# Altium PCB PokerFace.PcbDoc
Units mm, origin at the board's own origin, x right, y up, seen from the top; angles counter-clockwise.
Board outline 46.23 x 56.39 mm, 2 copper layers (Top Layer, Bottom Layer); 54 components, 99 nets, 312 pads, 39 vias.
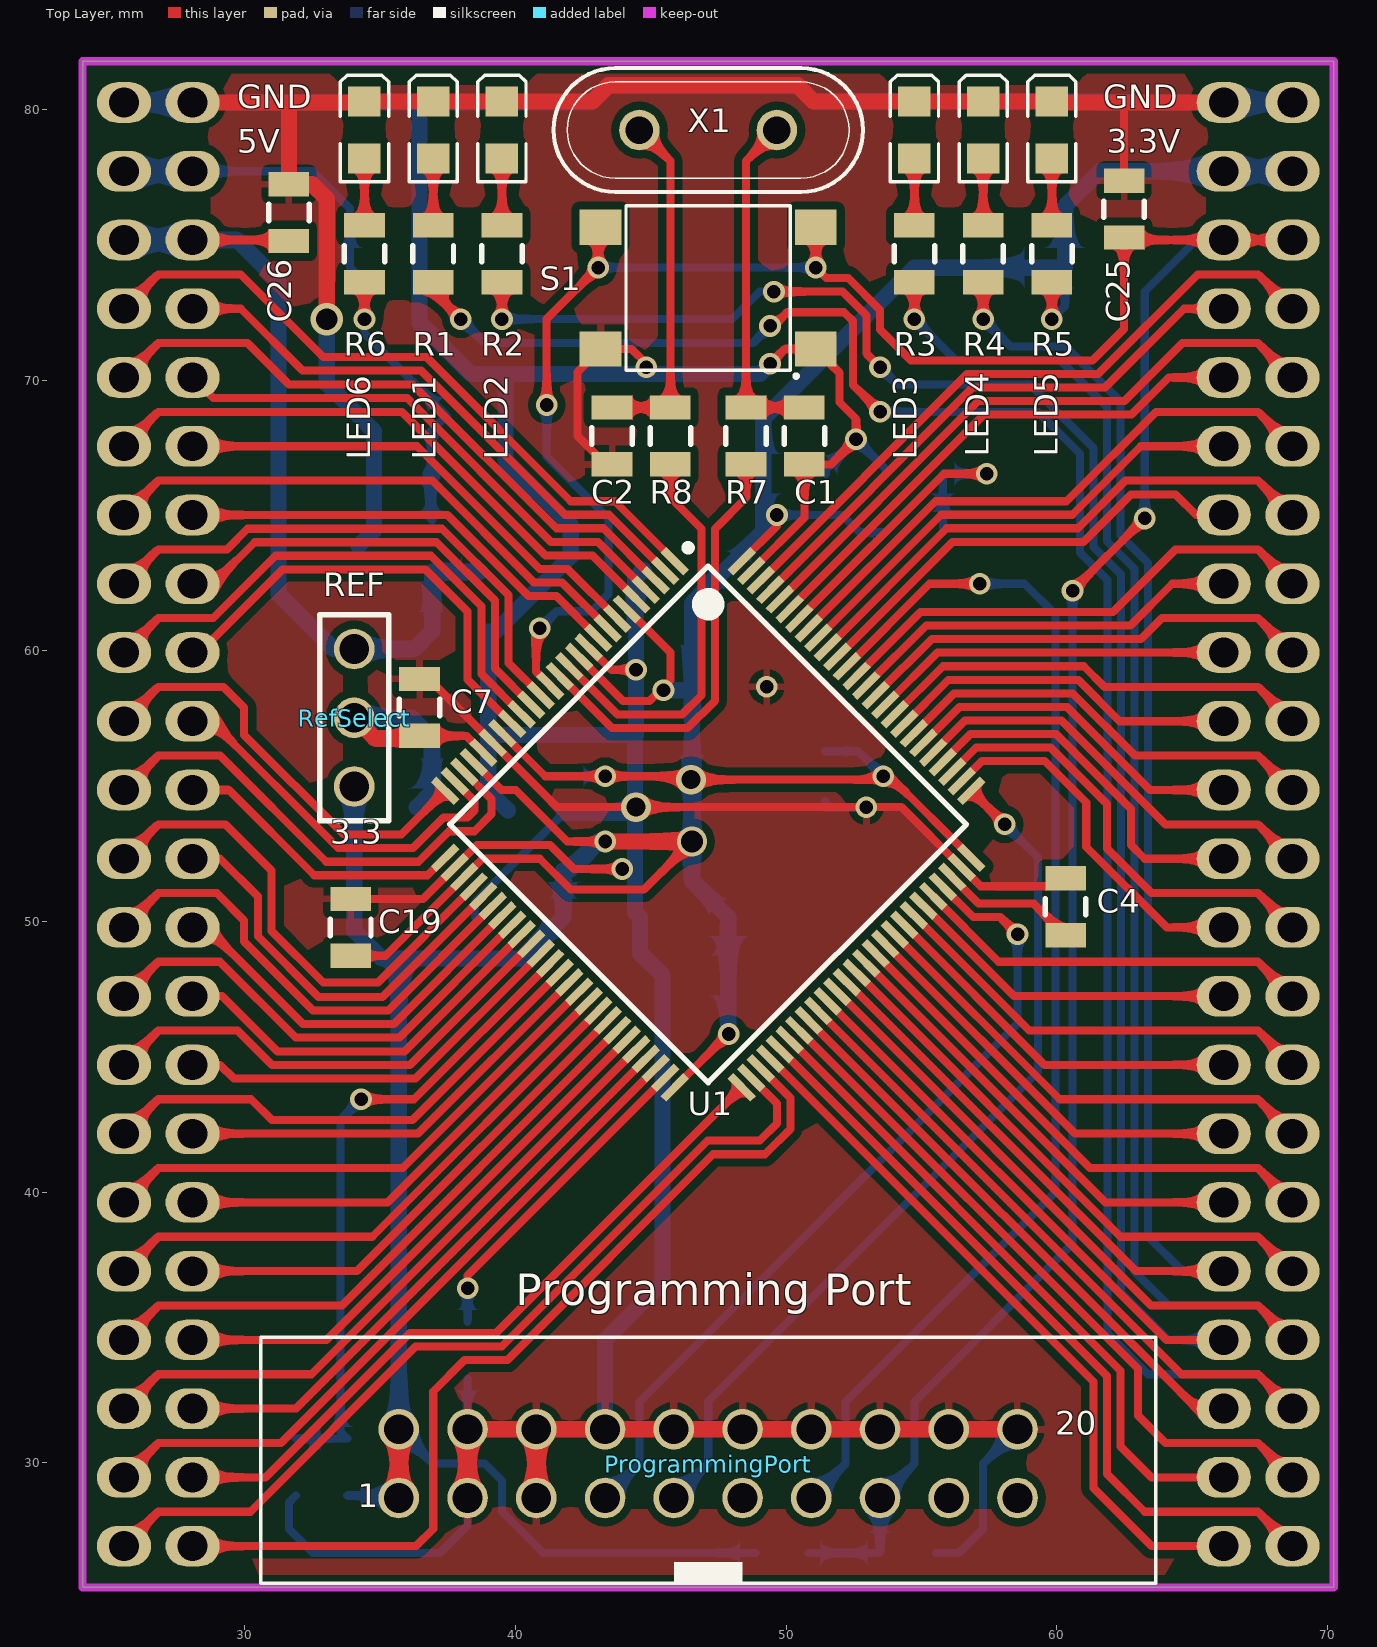
[diagram p0: Top Layer view]
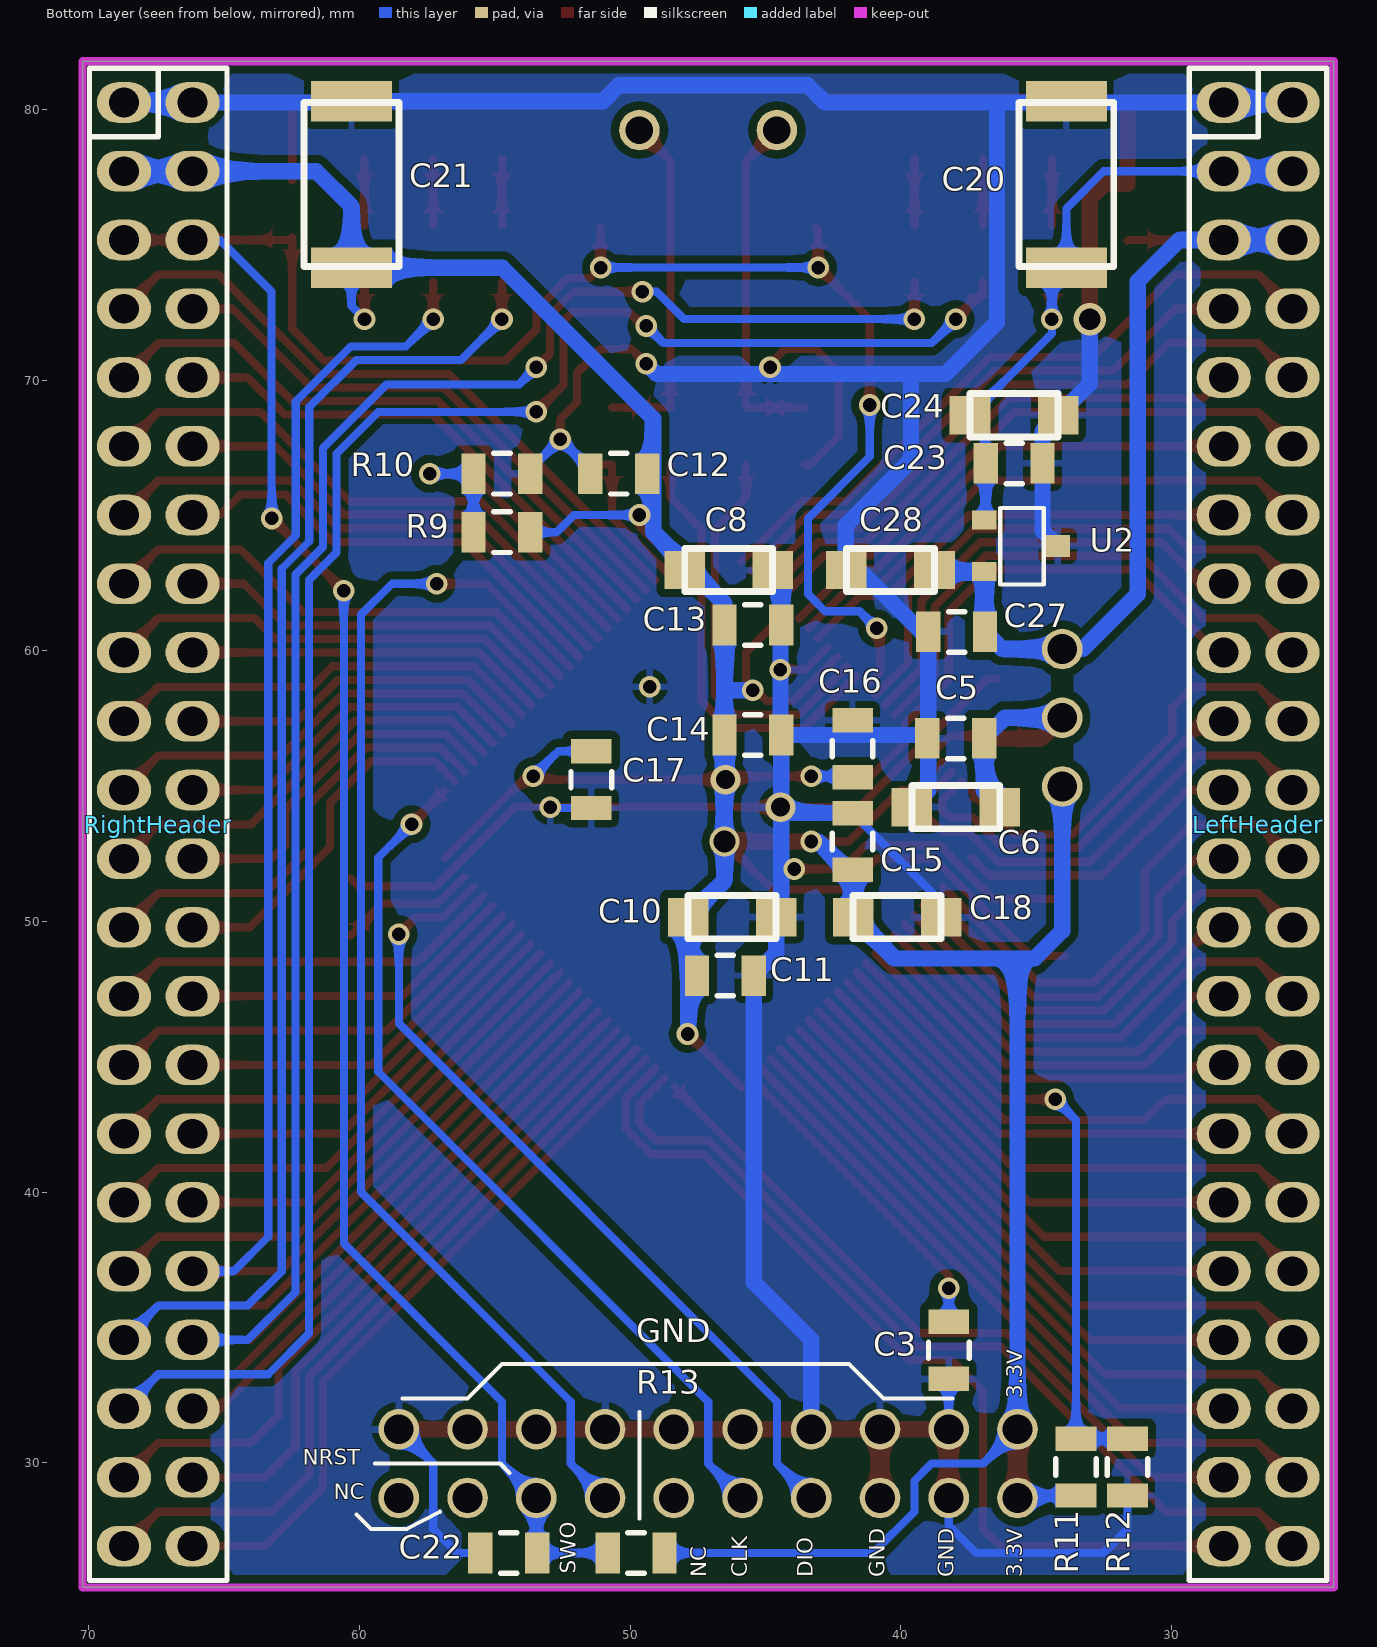
[diagram p1: Bottom Layer view, seen from below]
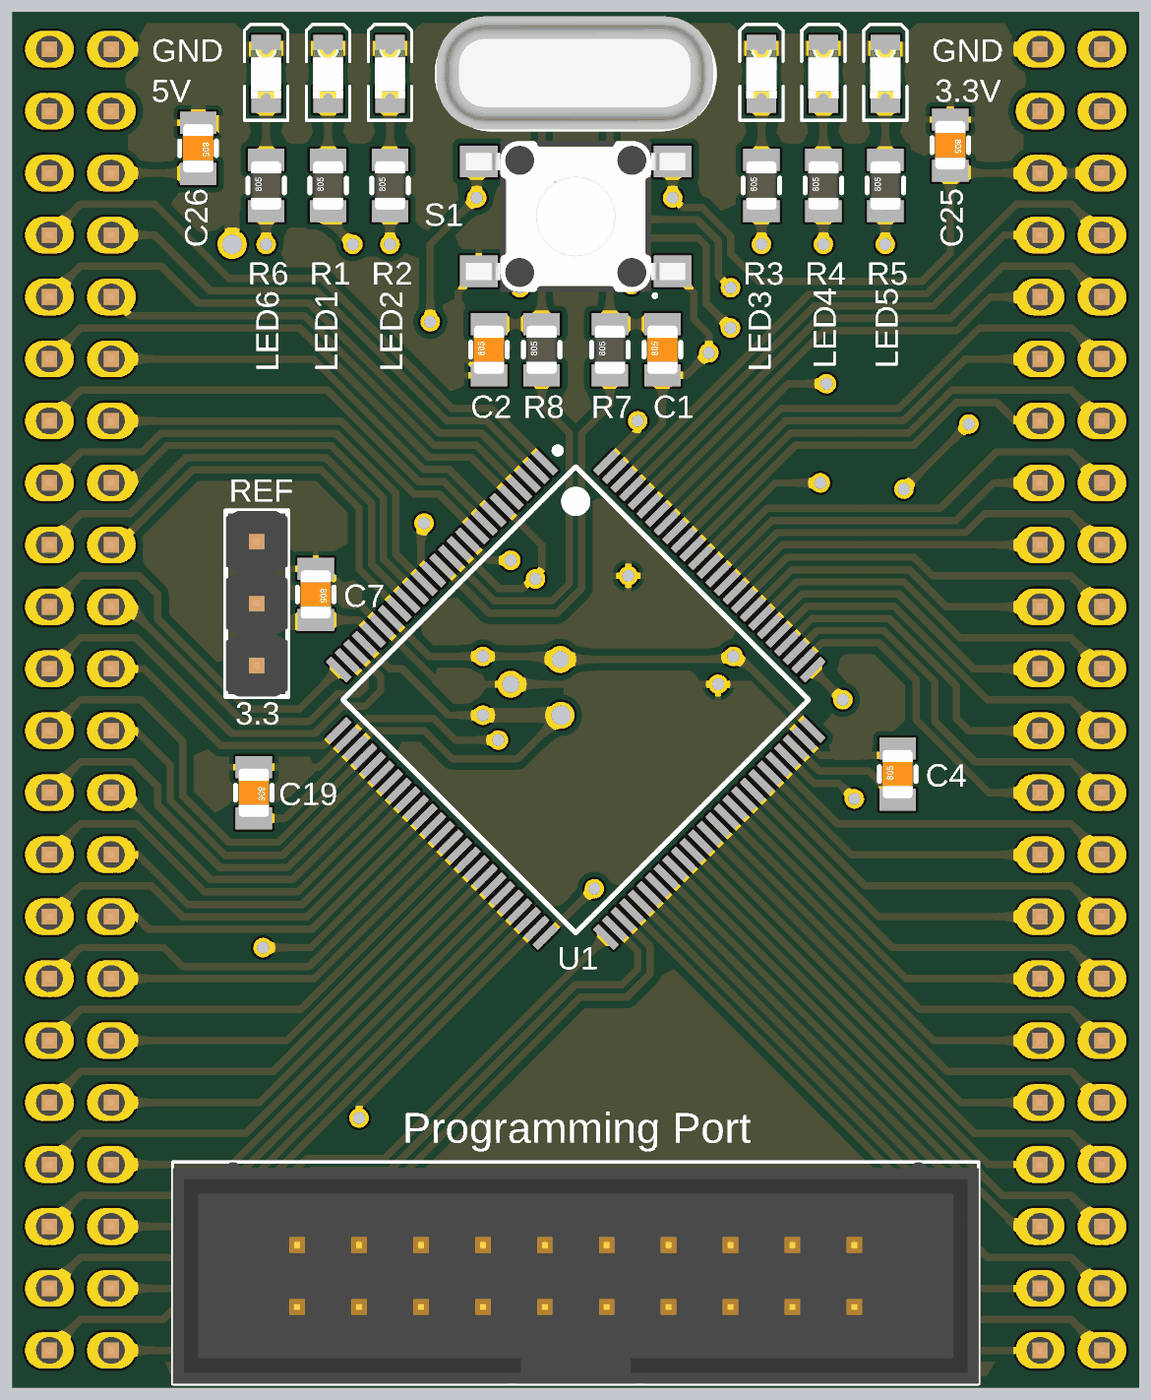
[diagram p2: 3D render of the assembled board from above, using the file's embedded part models]
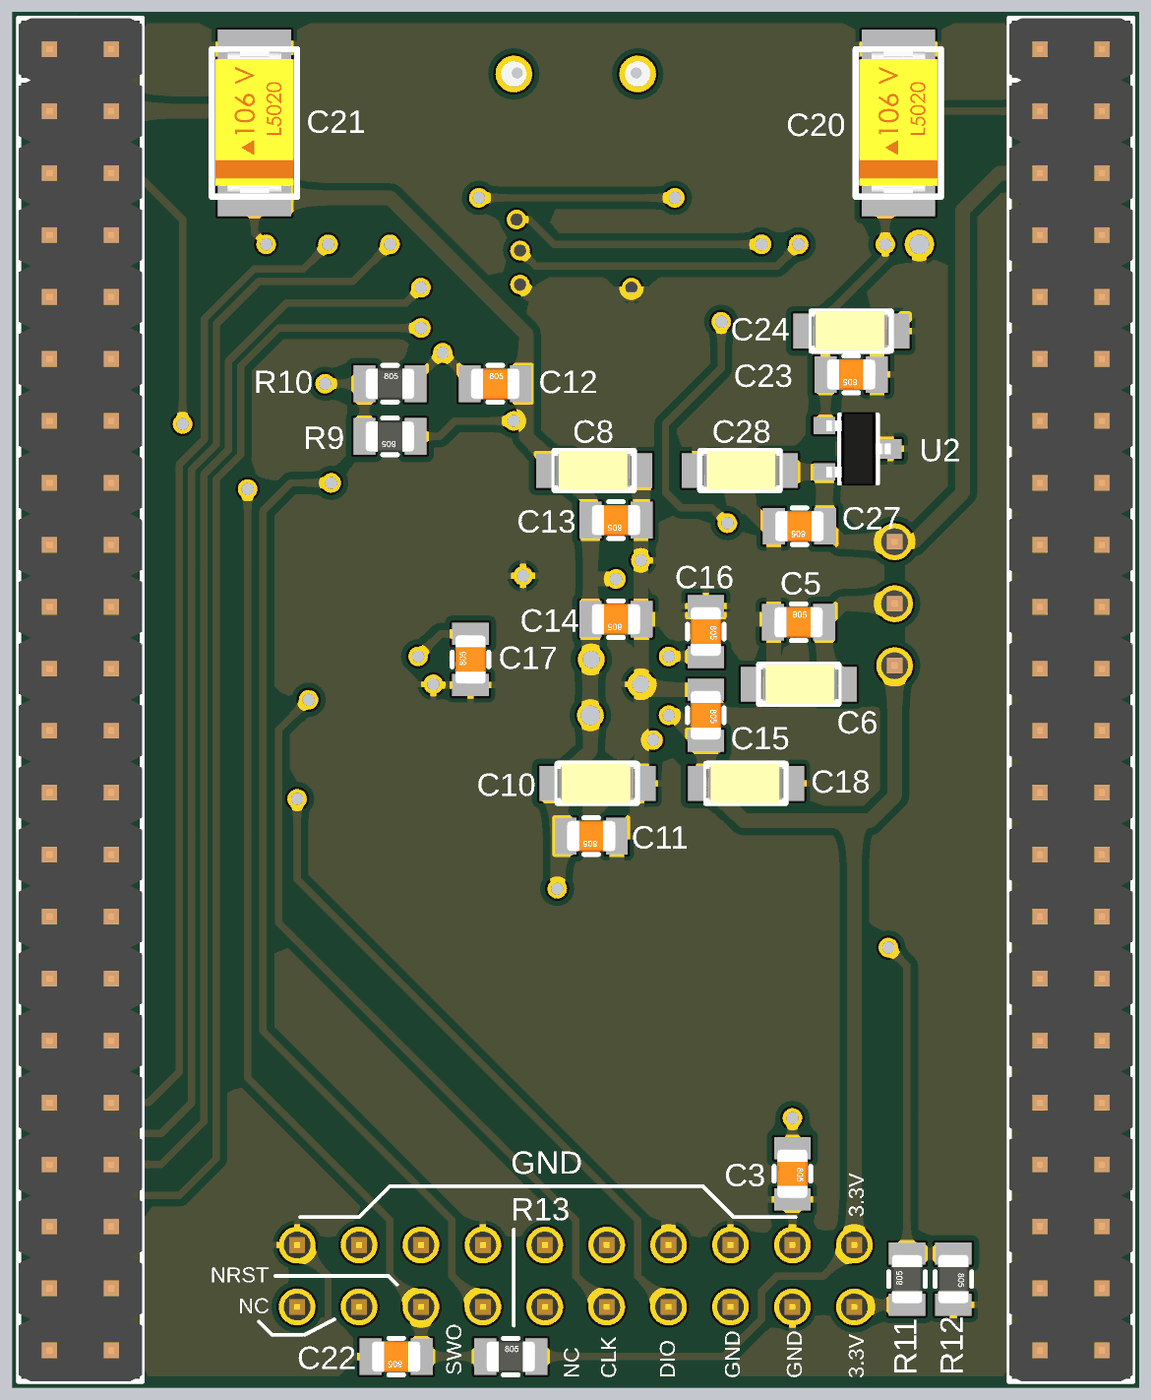
[diagram p3: 3D render of the assembled board from below, using the file's embedded part models]

## Layer stack, top to bottom
Top Solder: solder mask 0.0102, Solder Resist, Dk 3.5
Top Layer: signal copper 0.0356
Dielectric 1: dielectric 0.32, FR-4, Dk 4.8
Bottom Layer: signal copper 0.0356
Bottom Solder: solder mask 0.0102, Solder Resist, Dk 3.5

## Board outline
24.003,25.4 24.003,81.788 70.231,81.788 70.231,25.4

## Design rules (kind name [scope] priority, off if disabled: settings)
Clearance [All] p1: gap=0.2 ignorepadtopadclearanceinfootprint=FALSE except(0.3: Arc-Poly Track-Poly SMDPad-Poly THPad-Poly Via-Poly Fill-Poly Poly-Poly Poly-Region Poly-Text Poly-Hole)
PolygonConnect [All] p1: connectstyle=Relief reliefconductorwidth=0.254 reliefentries=4 polygonreliefangle="90 Angle" airgapwidth=0.254
RoutingVias [All] p1: holewidth=0.5 width=0.8 viastyle="Through Hole" minholewidth=0.5 minwidth=0.8 maxholewidth=1.5 maxwidth=2
SolderMaskExpansion [All] p1: expansion=0.102
Width [All] p1: maxlimit=0.6 minlimit=0.3 preferedwidth=0.3
30 further rules are at their usual default settings.

## Components (designator, comment, footprint, x,y, rotation, side; value= is the part's Value field where it differs from the comment)
C1 "20pF" "SMD 805 CAP" 50.673,67.945 r90 top
C2 "20pF" "SMD 805 CAP" 43.561,67.945 r90 top
C3 "2.2uF" "SMD 805 CAP" 38.227,34.163 r270 bottom
C4 "2.2uF" "SMD 805 CAP" 60.325,50.546 r90 top
C5 "2.2uF" "SMD 805 CAP" 37.973,56.769 r180 bottom
C6 "TantalA-1uF" MY_CAP_SMD-A 37.973,54.229 r0 bottom value=3300u
C7 "100nF" "SMD 805 CAP" 36.449,57.912 r270 top
C8 "1uF" MY_CAP_SMD-A 46.355,62.992 r180 bottom value=3300u
C10 "1uF" MY_CAP_SMD-A 46.228,50.165 r180 bottom value=3300u
C11 "100nF" "SMD 805 CAP" 46.482,48.006 r0 bottom
C12 "100nF" "SMD 805 CAP" 50.419,66.548 r180 bottom
C13 "100nF" "SMD 805 CAP" 45.466,60.96 r0 bottom
C14 "100nF" "SMD 805 CAP" 45.466,56.896 r0 bottom
C15 "100nF" "SMD 805 CAP" 41.783,52.959 r270 bottom
C16 "100nF" "SMD 805 CAP" 41.783,56.388 r270 bottom
C17 "100nF" "SMD 805 CAP" 51.435,55.245 r90 bottom
C18 "TantalA-1uF" MY_CAP_SMD-A 40.132,50.165 r180 bottom value=3300u
C19 "100nF" "SMD 805 CAP" 33.909,49.784 r270 top
C20 "TantalD-220uF" MY_CAP_SMD-D 33.782,76.962 r90 bottom value=3300u
C21 "TantalD-220uF" MY_CAP_SMD-D 60.198,76.962 r90 bottom value=3300u
C22 "100nF" "SMD 805 CAP" 54.483,26.67 r0 bottom
C23 "100nF" "SMD 805 CAP" 35.814,66.929 r0 bottom
C24 "TantalA-1uF" MY_CAP_SMD-A 35.814,68.707 r180 bottom value=3300u
C25 "100nF" "SMD 805 CAP" 62.484,76.327 r270 top
C26 "100nF" "SMD 805 CAP" 31.623,76.2 r270 top
C27 "100nF" "SMD 805 CAP" 37.939,60.706 r0 bottom
C28 "TantalA-1uF" MY_CAP_SMD-A 40.386,62.992 r0 bottom value=3300u
LED1 "150080BS75000" LED_0805_Blue 36.957,79.248 r90 top
LED2 "150080BS75000" LED_0805_Blue 39.497,79.248 r90 top
LED3 "150080BS75000" LED_0805_Blue 54.737,79.248 r90 top
LED4 "150080BS75000" LED_0805_Blue 57.277,79.248 r90 top
LED5 "150080BS75000" LED_0805_Blue 59.817,79.248 r90 top
LED6 "150080BS75000" LED_0805_Blue 34.417,79.248 r90 top
LeftHeader "WE-2.54 mm Pin Header & Jumper 61304421121" 61304421121 26.797,53.594 r270 bottom
ProgrammingPort "Compatible With STLINKV2" 61202021621 47.117,29.972 r0 top
R1 "470" "SMD 805" 36.957,74.676 r90 top
R2 "470" "SMD 805" 39.497,74.676 r90 top
R3 "470" "SMD 805" 54.737,74.676 r90 top
R4 "470" "SMD 805" 57.277,74.676 r90 top
R5 "470" "SMD 805" 59.817,74.676 r90 top
R6 "470" "SMD 805" 34.417,74.676 r90 top
R7 "220" "SMD 805" 48.514,67.945 r90 top
R8 "0" "SMD 805" 45.72,67.945 r90 top
R9 "10K" "SMD 805" 54.737,64.389 r0 bottom
R10 "510" "SMD 805" 54.737,66.548 r180 bottom
R11 "10K" "SMD 805" 33.528,29.845 r90 bottom
R12 "510" "SMD 805" 31.623,29.845 r270 bottom
R13 "10K" "SMD 805" 49.784,26.67 r180 bottom
RefSelect "WE-2.54 mm Pin Header & Jumper 61300311121" 61300311121 34.036,54.991 r90 top
RightHeader "WE-2.54 mm Pin Header & Jumper 61304421121" 61304421121 67.437,53.594 r270 bottom
S1 "6*6 TactSwitch" 4301x20508x6 47.117,73.406 r180 top
U1 "STM32F407VGT6" LQFP100_V 47.117,53.594 r315 top locked
U2 "ISL21010" SOT-23 35.56,63.881 r270 bottom
X1 "8MHz-10ppm" My_Crystal 47.117,79.248 r0 top

## Footprints (in the part's own frame and the unit in brackets; to place one, negate y for a bottom-side part, rotate by r counter-clockwise, add the part's x,y. Pads: shape width x height; smd on the part's side, far side on the other; paste and mask are expansions set on the pad)
4301x20508x6 [mm] "6*6mm vertical type, SMD, height 5.0mm, black actuator, 160gf, T&R"
  rect 1.55x1.3 smd: 1(-3.975,2.25) 2(-3.975,-2.25) 3(3.975,2.25) 4(3.975,-2.25)
  silkscreen extent -3.29,-3.04 3.04,3.29, body extent -4.5,-3.1 4.5,3.1, height 4.99
61202021621 [mm] "20 pins, straight, gold plating"
  round 1.5 hole 1.1: 1(-11.43,-1.27) 2(-11.43,1.27) 3(-8.89,-1.27) 4(-8.89,1.27) 5(-6.35,-1.27) 6(-6.35,1.27) 7(-3.81,-1.27) 8(-3.81,1.27) 9(-1.27,-1.27) 10(-1.27,1.27) 11(1.27,-1.27) 12(1.27,1.27) 13(3.81,-1.27) 14(3.81,1.27) 15(6.35,-1.27) 16(6.35,1.27) 17(8.89,-1.27) 18(8.89,1.27) 19(11.43,-1.27) 20(11.43,1.27)
  silkscreen extent -16.53,-4.42 16.53,4.68, body extent -16.53,-4.42 16.53,4.68, height 9.13
61300311121 [mm] "3 pins, 1 row, straight, gold plating"
  round 1.5 hole 1.1: 1(0,0) 2(2.54,0) 3(5.08,0)
  silkscreen extent -1.27,-1.27 6.35,1.27, body extent -1.27,-1.27 6.35,1.27, height 8.54
61304421121 [mm] "44 pins, dual pin, straight, gold plating"
  oval 1.5x2 hole 1.1: 1(-26.67,-1.27) 2(-24.13,-1.27) 3(-21.59,-1.27) 4(-19.05,-1.27) 5(-16.51,-1.27) 6(-13.97,-1.27) 7(-11.43,-1.27) 8(-8.89,-1.27) 9(-6.35,-1.27) 10(-3.81,-1.27) 11(-1.27,-1.27) 12(1.27,-1.27) 13(3.81,-1.27) 14(6.35,-1.27) 15(8.89,-1.27) 16(11.43,-1.27) 17(13.97,-1.27) 18(16.51,-1.27) 19(19.05,-1.27) 20(21.59,-1.27) 21(24.13,-1.27) 22(26.67,-1.27) 23(26.67,1.27) 24(24.13,1.27) 25(21.59,1.27) 26(19.05,1.27) 27(16.51,1.27) 28(13.97,1.27) 29(11.43,1.27) 30(8.89,1.27) 31(6.35,1.27) 32(3.81,1.27) 33(1.27,1.27) 34(-1.27,1.27) 35(-3.81,1.27) 36(-6.35,1.27) 37(-8.89,1.27) 38(-11.43,1.27) 39(-13.97,1.27) 40(-16.51,1.27) 41(-19.05,1.27) 42(-21.59,1.27) 43(-24.13,1.27) 44(-26.67,1.27)
  silkscreen extent -27.94,-2.54 27.94,2.54, body extent -27.94,-2.54 27.94,2.54, height 8.55
LED_0805_Blue [mm] "Chip LED, 2-Leads, Body 2.0x1.3mm, IPC Medium Density"
  rect 1.1x1.2 smd: 1(-1.05,0) 2(1.05,0)
  silkscreen extent -1.91,-0.89 2.03,0.89, body extent -1,-0.63 1,0.62, height 0.68
LQFP100_V [mm] "Thin QFP, 100-Leads, Body 14x14mm, Pitch 0.5mm, ST Recommended"
  rect 1.2x0.3 smd: 1(-7.75,6) 2(-7.75,5.5) 3(-7.75,5) 4(-7.75,4.5) 5(-7.75,4) 6(-7.75,3.5) 7(-7.75,3) 8(-7.75,2.5) 9(-7.75,2) 10(-7.75,1.5) 11(-7.75,1) 12(-7.75,0.5) 13(-7.75,0) 14(-7.75,-0.5) 15(-7.75,-1) 16(-7.75,-1.5) 17(-7.75,-2) 18(-7.75,-2.5) 19(-7.75,-3) 20(-7.75,-3.5) 21(-7.75,-4) 22(-7.75,-4.5) 23(-7.75,-5) 24(-7.75,-5.5) 25(-7.75,-6) 51(7.75,-6) 52(7.75,-5.5) 53(7.75,-5) 54(7.75,-4.5) 55(7.75,-4) 56(7.75,-3.5) 57(7.75,-3) 58(7.75,-2.5) 59(7.75,-2) 60(7.75,-1.5) 61(7.75,-1) 62(7.75,-0.5) 63(7.75,0) 64(7.75,0.5) 65(7.75,1) 66(7.75,1.5) 67(7.75,2) 68(7.75,2.5) 69(7.75,3) 70(7.75,3.5) 71(7.75,4) 72(7.75,4.5) 73(7.75,5) 74(7.75,5.5) 75(7.75,6)
  rect 0.3x1.2 smd: 26(-6,-7.75) 27(-5.5,-7.75) 28(-5,-7.75) 29(-4.5,-7.75) 30(-4,-7.75) 31(-3.5,-7.75) 32(-3,-7.75) 33(-2.5,-7.75) 34(-2,-7.75) 35(-1.5,-7.75) 36(-1,-7.75) 37(-0.5,-7.75) 38(0,-7.75) 39(0.5,-7.75) 40(1,-7.75) 41(1.5,-7.75) 42(2,-7.75) 43(2.5,-7.75) 44(3,-7.75) 45(3.5,-7.75) 46(4,-7.75) 47(4.5,-7.75) 48(5,-7.75) 49(5.5,-7.75) 50(6,-7.75) 76(6,7.75) 77(5.5,7.75) 78(5,7.75) 79(4.5,7.75) 80(4,7.75) 81(3.5,7.75) 82(3,7.75) 83(2.5,7.75) 84(2,7.75) 85(1.5,7.75) 86(1,7.75) 87(0.5,7.75) 88(0,7.75) 89(-0.5,7.75) 90(-1,7.75) 91(-1.5,7.75) 92(-2,7.75) 93(-2.5,7.75) 94(-3,7.75) 95(-3.5,7.75) 96(-4,7.75) 97(-4.5,7.75) 98(-5,7.75) 99(-5.5,7.75) 100(-6,7.75)
  silkscreen extent -7.87,-6.75 6.75,6.82, body extent -7,-7 7,7, height 1.6
MY_CAP_SMD-A [mm] "1.6X3.25"
  rect 1.5x1.42 smd: +(-1.63,0) -(1.63,0)
  silkscreen extent -1.63,-0.8 1.62,0.8, body extent -1.64,-0.8 1.54,0.8, height 1.77
MY_CAP_SMD-D [mm] "3.5X6"
  rect 1.5x3 smd: +(-2.8,0.1) -(3.35,0.1)
  silkscreen extent -2.75,-1.65 3.3,1.85, body extent -2.6,-1.5 3.2,1.7, height 2.6
My_Crystal [mm]
  round 1.5 hole 1.016: 1(-2.54,0) 2(2.54,0)
  silkscreen extent -5.71,-2.29 5.71,2.29, body extent -5.71,-2.29 5.64,2.36, height 3.8
"SMD 805" [mm]
  rect 0.9x1.5 smd: 1(1.05,0) 2(-1.05,0)
  silkscreen extent -0.3,-0.75 0.3,0.75, body extent -1,-0.62 1,0.63, height 0.78
"SMD 805 CAP" [mm]
  rect 0.9x1.5 smd: 1(1.05,0) 2(-1.05,0)
  silkscreen extent -0.3,-0.75 0.3,0.75, body extent -1,-0.62 1,0.63, height 0.78
SOT-23 [mm]
  rect 0.7x0.9 smd: 1(-0.95,-1.36) 3(0.95,-1.36)
  rect 0.8x0.9 smd: 2(0,1.36)
  silkscreen extent -1.4,-0.76 1.42,0.84, body extent -1.5,-1.28 1.5,1.36, height 1.08

## Part data
C1 C2 C3 C4 C5 C7 C11 C12 C13 C14 C15 C16 C17 C19 C22 C23 C25 C26 C27: library part "CAP without Pole"
C6 C8 C10 C18 C24 C28: library part CAP_TANTAL_A, "3.2X1.6MM"
C20 C21: library part CAP_TANTAL_D, "7.3X4.3MM"
LED1 LED2 LED3 LED4 LED5 LED6: library part "WL-SMCW 0805  150080BS75000", "SMD mono-color Chip LED, WL-SMCW, Blue", Color=Blue, Manufacturer="W?th Elektronik eiSos GmbH", ComponentLink1Description=Manufacturer, ComponentLink1URL=http://www.we-online.de, ComponentLink2Description=Datasheet, ComponentLink2URL=http://katalog.we-online.com/led/datasheet/150080BS75000.pdf, Created by="Christin Otto", Created Date="June 2013", partNo=150080BS75000
LeftHeader RightHeader: "WR-PHD 2.54 mm Dual Pin Header", Manufacturer="Würth Elektronik eiSos GmbH", partNo=61304421121, ComponentLink1 Description=Manufacturer, ComponentLink1URL=http://www.we-online.com, ComponentLink2 Description=Datasheet, ComponentLink2URL=http://katalog.we-online.de/em/datasheet/6130xx21121.pdf, Created by="Karrer Zheng", Created Date="25 March 2013", NoPins=44
ProgrammingPort: library part "WE-2,54mm_Box Header 61202021621", "WR-BHD 2.54mm Male Box Header", Manufacturer="Würth Elektronik eiSos GmbH", partNo=61202021621, ComponentLink1 Description=Manufacturer, ComponentLink1URL=http://www.we-online.com, ComponentLink2 Description=Datasheet, ComponentLink2URL=http://katalog.we-online.de/em/datasheet/6120xx21621.pdf, Created by="Karrer Zheng", Created Date="6 May 2013", NoPins=20
R1 R2 R3 R4 R5 R6 R7 R8 R9 R10 R11 R12 R13: library part Resistor
RefSelect: "WR-PHD 2.54mm Pin Header", Manufacturer="Würth Elektronik eiSos GmbH", partNo=61300311121, ComponentLink1 Description=Manufacturer, ComponentLink1URL=http://www.we-online.com, ComponentLink2 Description=Datasheet, ComponentLink2URL=http://katalog.we-online.de/em/datasheet/6130xx11121.pdf, Created by="Karrer Zheng", Created Date="22 March 2013", NoPins=03
S1: library part "WS-TASV, 430152050836", "WS-TASV 6x6 mm SMD", Manufacturer="Wurth Elektronik", partNo=430152050836, ComponentLink1Description=Manufacturer, ComponentLink1URL=http://www.we-online.de, ComponentLink2Description=Datasheet, ComponentLink2URL=http://katalog.we-online.de/em/datasheet/4301x2xxx8x6.pdf, Created by="Baojun Chen", Created Date=Dec.2015
U1: "ARM Cortex-M4 32b MCU+FPU, 210DMIP, 1024 kB Flash, 192+4 kB RAM, Camera, 82 I/Os, 100-pin LQFP, -40 to +85癈, Tray", Operating Frequency (Processor Speed)=168MHz, 16-bit Timers (IC/OC/PWM)=12x16-bit(24/24/30), 32-bit Timer (IC/OC/PWM)="2x32-bit (8/8/8)", A/D Converter=16x12-bit, ComponentLink1Description="Manufacturer URL", ComponentLink1URL=http://www.st.com/, ComponentLink2Description="STM32F405/7 Datasheet", ComponentLink2URL=http://www.st.com/internet/com/TECHNICAL_RESOURCES/TECHNICAL_LITERATURE/DATASHEET/DM00037051.pdf, ComponentLink3Description="STM32F4 Web Page", ComponentLink3URL=http://www.st.com/internet/mcu/subclass/1521.jsp, D/A Converter=2x12-bit, DatasheetVersion="rev2, Jan-2012", Internal RAM=192kB, Other Timer Functions="2xWDG, RTC, 24-bit down counter", PackageDescription="100-Pin Low Profile Quad Flat Package, 14x14 mm Body, 0.5 mm Pitch", PackageReference=LQFP100, PackageVersion=2012, Serial Interface="3xSPI/2xI2S/2xI2C/3xUSART(IrDa, ISO7816)/3xUART/2xUSB OTG FS/HS, 2xCAN/Ethernet MAC10/100, SDIO"
X1: library part CRYSTAL, "Crystal"

## Via types
v1: diameter 0.8, hole 0.5, Top Layer to Bottom Layer, 35 vias
v2: diameter 1.1, hole 0.7, Top Layer to Bottom Layer, 2 vias
v3: diameter 1.2, hole 0.8, Top Layer to Bottom Layer, 1 vias
v4: diameter 1.1, hole 0.8, Top Layer to Bottom Layer, 1 vias

## Nets (pads, with @x,y where several pads share a name; then routed paths per layer and width w, separated by ;. In a path a pad name is that pad's centre, name@x,y a point inside that pad or via, vN(x,y) a via of type N, cw(c..) or ccw(c..) an arc to the next point about the centre after c; other vN are vias at no path point)
3.3V: C8.+ C10.+ C11.1 C12.1 C13.1 C14.1 C15.1 C16.1 C17.1 C18.+ C19.1 C21.+ ProgrammingPort.1 ProgrammingPort.2 R5.2 R9.2 R11.2 R13.1 RefSelect.1 RightHeader.2 RightHeader.43 U1.6 U1.11 U1.19 U1.22 U1.28 U1.50 U1.75 U1.100 | length 174.3
  Top Layer w0.3: C19.1 35.186,48.734 U1.28 38.776,52.324 40.894,52.324 42.037,51.181 44.738,51.181 v4(46.516,52.959) ; U1.22 39.483,54.864 40.005,54.864 41.91,52.959 v1(43.307,52.959) ; U1.19 41.096,55.372 v1(43.307,55.372) 46.355,55.372 v2(46.482,55.245) 53.455,55.245 v1(53.582,55.372) 53.824,55.372 U1.75 ; U1.11 43.975,58.15 44.942,58.15 45.339,58.547 v1(45.466,58.547) 45.466,58.674 45.72,58.928 45.72,59.941 U1.6 ; U1.50 v1@47.867,45.859 ; U1.100 49.657,64.619 v1(49.657,65.024) ; v1(59.817,72.263) R5.2 R5.2@59.817,73.753
  Top Layer w0.6: ProgrammingPort.1 ProgrammingPort.2 ; v1(43.307,52.959) v4(46.516,52.959)
  Bottom Layer w0.3: R11.2@33.782,28.795 35.594,28.795 ProgrammingPort.1 ; ProgrammingPort.2 36.957,29.972 38.862,29.972 39.497,29.337 39.497,28.194 41.021,26.67 R13.1 R13.1@48.861,26.67 ; C16.1@41.656,55.338 41.69,55.372 v1(43.307,55.372) ; C15.1@41.762,51.888 C15.1 C15.1@42.003,51.909 ; v1@43.053,52.959 v1(43.307,52.959) ; 46.508,58.539 46.516,58.547 ; v1(49.657,65.024) 52.07,65.024 52.705,64.389 R9.2 ; C17.1 52.659,56.295 v1(53.582,55.372) ; v1(59.817,72.263) 60.298,72.744 C21.+
  Bottom Layer w0.6: RefSelect.1 34.036,49.657 35.052,48.641 35.687,48.641 ; ProgrammingPort.2 35.687,48.641 ; C15.1@41.762,51.888 C18.+ 40.238,48.641 35.687,48.641 ; C15.1@42.003,51.909 v1@43.053,52.959 ; v1(45.466,58.547) 46.5,58.547 46.508,58.539 ; v1(47.879,45.847) 47.858,45.868 C10.+ 46.516,51.507 v4(46.516,52.959) C14.1 46.516,58.547 C13.1 46.516,61.756 49.149,64.389 49.149,68.58 54.731,74.162 C21.+ 60.298,76.427 61.595,77.724 RightHeader.43 RightHeader.2
3.3VRef: C26.1 C27.2 C28.+ LeftHeader.3 LeftHeader.42 RefSelect.3 U2.3 | length 32.3
  Top Layer w0.3: LeftHeader.3 31.589,75.184 C26.1
  Bottom Layer w0.3: C27.2 C27.2@36.92,60.737 ; C28.+@38.695,62.931 C28.+
  Bottom Layer w0.6: LeftHeader.42 LeftHeader.3 29.718,75.184 31.242,73.66 31.242,62.103 33.274,60.071 RefSelect.3 36.254,60.071 C27.2 ; C27.2@36.92,60.737 U2.3 C28.+@38.695,62.931
5V: C20.+ C23.1 C24.+ LeftHeader.2 LeftHeader.43 R6.2 U2.1 | length 23.6
  Top Layer w0.3: v1(34.417,72.263) R6.2
  Bottom Layer w0.3: LeftHeader.2 32.512,77.724 33.882,76.354 C20.+ 34.417,73.627 v1(34.417,72.263) 34.417,71.734 C24.+ 36.864,68.127 C23.1 36.864,66.538 36.864,64.887 U2.1
  Bottom Layer w0.6: LeftHeader.43 LeftHeader.2 ; C23.1@36.864,66.538 C23.1@36.92,66.482
GND: C1.2 C2.2 C3.1 C4.1 C5.2 C6.- C7.2 C8.- C10.- C11.2 C12.2 C13.2 C14.2 C15.2 C16.2 C17.2 C18.- C19.2 C20.- C21.- C22.1 C23.2 C24.- C25.2 C26.2 C27.1 C28.- LED1.2 LED2.2 LED3.2 LED4.2 LED5.2 LED6.2 LeftHeader.1 LeftHeader.44 ProgrammingPort.3 ProgrammingPort.4 ProgrammingPort.5 ProgrammingPort.6 ProgrammingPort.8 ProgrammingPort.10 ProgrammingPort.12 ProgrammingPort.14 ProgrammingPort.16 ProgrammingPort.18 ProgrammingPort.20 R10.1 R12.1 RightHeader.1 RightHeader.44 S1.1 S1.3 U1.10 U1.20 U1.27 U1.74 U1.99 U2.2 | length 300.3
  Top Layer w0.3: C19.2 36.579,50.834 U1.27 38.577,52.832 41.275,52.832 42.164,51.943 v1(43.942,51.943) ; LED6.2@34.383,80.264 LED6.2 ; C7.2 36.799,58.962 U1.20 41.532,54.229 v2(44.45,54.229) v1(52.959,54.229) 54.26,54.229 U1.74 57.181,51.308 60.037,51.308 C4.1 ; U1.10 43.523,59.309 v1(44.45,59.309) ; C2.2 43.341,66.895 42.291,67.945 42.291,70.305 S1.3 44.287,71.156 44.831,70.612 v1(44.831,70.485) ; U1.99 50.673,64.928 C1.2 51.655,66.895 v1(52.578,67.818) 52.578,68.58 51.967,69.191 51.967,70.281 S1.1 49.947,71.156 v1(49.403,70.612) ; LED5.2 LED5.2@59.851,80.264 ; C25.2 62.484,80.264
  Top Layer w0.6: LeftHeader.1 31.623,80.264 ; v3(33.02,72.263) 33.02,76.708 32.478,77.25 C26.2 31.623,80.264 ; LED6.2@34.383,80.264 31.623,80.264 ; LED6.2 LED1.2 LED2.2 42.833,80.298 43.434,80.899 50.419,80.899 51.02,80.298 LED3.2 LED4.2 LED5.2 ; ProgrammingPort.3 ProgrammingPort.4 ProgrammingPort.6 ; ProgrammingPort.5 ProgrammingPort.6 ; ProgrammingPort.20 ProgrammingPort.18 ProgrammingPort.16 ProgrammingPort.14 ProgrammingPort.12 ProgrammingPort.10 ProgrammingPort.8 ProgrammingPort.6 ; LED5.2@59.851,80.264 62.484,80.264 RightHeader.44
  Bottom Layer w0.3: R12.1@31.877,28.795 31.623,28.541 31.623,27.559 32.512,26.67 37.211,26.67 38.227,27.686 ProgrammingPort.3 ; ProgrammingPort.4 C3.1 ; C18.- 38.502,50.728 C15.2 ; C13.2 C13.2@44.45,60.926 ; C17.2 52.925,54.195 v1(52.959,54.229) ; C17.2@51.435,54.449 C17.2@51.528,54.356 ; C12.2 51.469,66.709 v1(52.578,67.818) 53.687,66.709 R10.1 ; C22.1 56.388,26.67 57.277,27.559 57.277,29.972 ProgrammingPort.20
  Bottom Layer w0.6: LeftHeader.44 LeftHeader.1 36.449,80.264 ; v3(33.02,72.263) 33.02,69.871 C24.- 34.764,68.127 C23.2 34.764,64.445 U2.2 ; C6.-@39.717,54.115 C6.- 38.989,54.843 C5.2@38.989,56.769 ; C15.2 44.23,54.009 v2@44.416,54.195 ; ProgrammingPort.8 43.307,34.544 45.432,36.669 C11.2 44.598,48.84 C10.- 44.416,50.347 v2@44.416,54.195 ; C13.2 44.416,62.683 C8.- ; v2(44.45,54.229) v2@44.416,54.195 ; C14.2@44.45,56.896 v1(44.45,59.309) C13.2@44.45,60.926 ; v1(49.403,70.612) 49.022,70.231 39.624,70.231 ; RightHeader.1 RightHeader.44 61.616,80.264 61.568,80.312 C21.- 51.006,80.312 50.419,80.899 43.434,80.899 42.799,80.264 36.449,80.264 ; 36.449,80.264 36.449,72.136 38.354,70.231 39.624,70.231 ; C5.2@38.989,56.769 39.116,56.896 C14.2 v2@44.416,54.195 ; C5.2@38.989,56.769 C27.1 39.243,60.706 42.037,63.5 42.037,64.643 39.624,67.056 39.624,70.231
  other v1: 49.276,58.674
LEDCONTROL1: R1.2 RightHeader.20 U1.59 | length 93.6
  Top Layer w0.3: R1.2 36.957,73.279 v1(37.973,72.263) ; v1(49.403,72.009) 49.53,72.009 50.038,72.517 52.141,72.517 52.467,72.191 52.467,69.834 v1(53.467,68.834) ; U1.59 64.609,33.274 67.437,33.274 RightHeader.20
  Bottom Layer w0.3: v1(37.973,72.263) 38.862,71.374 48.768,71.374 v1(49.403,72.009) ; v1(53.467,68.834) 59.309,68.834 60.857,67.286 60.857,63.641 61.873,62.625 61.873,34.774 63.373,33.274 67.437,33.274 RightHeader.20
LEDCONTROL2: R2.2 RightHeader.26 U1.60 | length 81.8
  Top Layer w0.3: v1(39.497,72.263) R2.2 ; v1(49.546,73.279) 52.086,73.279 52.967,72.398 52.967,70.985 v1(53.467,70.485) ; U1.60 64.046,34.544 65.151,34.544
  Bottom Layer w0.3: v1(39.497,72.263) 48.006,72.263 49.022,73.279 v1(49.546,73.279) ; v1(53.467,70.485) 54.102,69.85 59,69.85 61.357,67.493 61.357,63.848 62.373,62.832 62.373,36.306 64.135,34.544 RightHeader.26
LEDCONTROL3: R3.2 RightHeader.19 U1.61 | length 71.2
  Top Layer w0.3: U1.61 63.483,35.814 67.437,35.814 RightHeader.19 ; v1(54.737,72.263) R3.2
  Bottom Layer w0.3: v1(54.737,72.263) 56.253,70.747 60.118,70.747 61.857,69.008 61.857,64.055 62.873,63.039 62.873,37.076 64.135,35.814 67.437,35.814 RightHeader.19
LEDCONTROL4: R4.2 RightHeader.27 U1.62 | length 60.7
  Top Layer w0.3: U1.62 62.92,37.084 RightHeader.27 ; v1(57.277,72.263) R4.2
  Bottom Layer w0.3: v1(57.277,72.263) 58.293,71.247 60.325,71.247 62.357,69.215 62.357,64.262 63.373,63.246 63.373,38.354 64.643,37.084 RightHeader.27
NetC1_1: C1.1 R7.1 X1.2 | length 12.9
  Top Layer w0.3: X1.2 48.514,78.105 R7.1 C1.1
NetC2_1: C2.1 R8.1 X1.1 | length 12.9
  Top Layer w0.3: C2.1 R8.1 45.72,78.105 X1.1
NetC3_2: C3.2 U1.49 | length 12
  Top Layer w0.3: v1(38.227,36.449) 38.227,36.926 U1.49
  Bottom Layer w0.3: C3.2 v1(38.227,36.449)
NetC4_2: C4.2 U1.73 | length 5.1
  Top Layer w0.3: U1.73 57.109,50.673 59.148,50.673 C4.2
NetC5_1: C5.1 C6.+ C7.1 RefSelect.2 U1.21 | length 11.4
  Top Layer w0.3: C7.1@36.356,56.769 C7.1 38.192,56.862 U1.21
  Top Layer w0.6: RefSelect.2 34.798,56.769 C7.1@36.356,56.769
  Bottom Layer w0.6: RefSelect.2 36.161,57.531 C5.1 36.923,54.809 C6.+
NetLED1_1: LED1.1 R1.1 | length 2.5
  Top Layer w0.3: R1.1 LED1.1
NetLED2_1: LED2.1 R2.1 | length 2.5
  Top Layer w0.3: R2.1 LED2.1
NetLED3_1: LED3.1 R3.1 | length 2.5
  Top Layer w0.3: R3.1 LED3.1
NetLED4_1: LED4.1 R4.1 | length 2.5
  Top Layer w0.3: R4.1 LED4.1
NetLED5_1: LED5.1 R5.1 | length 2.5
  Top Layer w0.3: R5.1 LED5.1
NetLED6_1: LED6.1 R6.1 | length 2.5
  Top Layer w0.3: R6.1 LED6.1
NetR7_2: R7.2 U1.13 | length 16.2
  Top Layer w0.3: U1.13 43.561,57.15 46.355,57.15 47.363,58.158 47.363,64.508 48.514,65.659 R7.2
NetR8_2: R8.2 U1.12 | length 14.9
  Top Layer w0.3: U1.12 43.768,57.65 46.148,57.65 46.863,58.365 46.863,64.516 45.72,65.659 R8.2
NetR9_1: R9.1 R10.2 U1.94 | length 12.9
  Top Layer w0.3: U1.94 55.828,66.548 v1(57.404,66.548)
  Bottom Layer w0.3: R9.1 R10.2 v1(57.404,66.548)
NetR11_1: R11.1 R12.2 U1.37 | length 23.9
  Top Layer w0.3: v1(34.29,43.434) 36.25,43.434 U1.37
  Bottom Layer w0.3: R12.2@31.877,30.895 33.782,30.895 33.528,31.149 33.528,42.672 v1(34.29,43.434)
NRST: C22.2 C25.1 ProgrammingPort.15 R13.2 RightHeader.3 RightHeader.42 S1.2 S1.4 U1.14 | length 109.6
  Top Layer w0.3: v1(40.894,60.833) 40.757,60.696 40.757,59.247 U1.14 ; v1(41.148,69.088) 41.148,72.263 v1(43.053,74.168) 43.053,75.567 S1.4 ; S1.2 v1(51.092,74.168) 51.481,73.779 52.293,73.779 53.467,72.605 53.467,71.882 54.61,70.739 61.324,70.739 62.484,71.899 C25.1 62.577,75.184 RightHeader.42 RightHeader.3 ; v1(60.579,62.23) v1(63.246,64.897)
  Bottom Layer w0.3: v1(40.894,60.833) 41.529,61.468 42.799,61.468 43.434,62.103 43.434,64.897 41.148,67.183 v1(41.148,69.088) ; v1(43.053,74.168) v1(51.092,74.168) ; R13.2 C22.2 53.467,26.704 ProgrammingPort.15 54.737,29.972 54.737,32.258 60.579,38.1 v1(60.579,62.23) ; v1(63.246,64.897) 63.246,73.279 65.151,75.184
PA0: LeftHeader.34 U1.23 | length 18.5
  Top Layer w0.3: LeftHeader.34 26.797,56.134 29.083,56.134 33.004,52.213 36.41,52.213 37.537,53.34 38.481,53.34 39.116,53.975 39.116,54.524 U1.23
PA1: LeftHeader.10 U1.24 | length 14.3
  Top Layer w0.3: LeftHeader.10 28.757,57.404 33.448,52.713 36.203,52.713 37.33,53.84 38.219,53.84 38.481,54.102 38.481,54.452 U1.24
PA2: LeftHeader.35 U1.25 | length 15.9
  Top Layer w0.3: LeftHeader.35 26.797,58.674 29.21,58.674 29.972,57.912 29.972,56.896 33.655,53.213 35.776,53.213 U1.25
PA3: LeftHeader.11 U1.26 | length 10.9
  Top Layer w0.3: LeftHeader.11 29.409,54.864 32.56,51.713 36.751,51.713 U1.26
PA4: LeftHeader.33 U1.29 | length 18.6
  Top Layer w0.3: LeftHeader.33 26.797,53.594 29.282,53.594 30.988,51.888 30.988,49.657 32.893,47.752 34.911,47.752 U1.29
PA5: LeftHeader.12 U1.30 | length 15.3
  Top Layer w0.3: LeftHeader.12 29.083,52.324 30.48,50.927 30.48,49.458 32.718,47.22 35.086,47.22 U1.30
PA6: LeftHeader.32 U1.31 | length 18
  Top Layer w0.3: LeftHeader.32 26.797,51.054 28.956,51.054 29.972,50.038 29.972,49.259 32.511,46.72 35.293,46.72 U1.31
PA7: LeftHeader.13 U1.32 | length 14.6
  Top Layer w0.3: LeftHeader.13 28.575,49.784 32.139,46.22 35.5,46.22 U1.32
PA8: RightHeader.16 U1.67 | length 17.7
  Top Layer w0.3: U1.67 60.105,43.434 67.437,43.434 RightHeader.16
PA9: RightHeader.30 U1.68 | length 13.9
  Top Layer w0.3: U1.68 59.543,44.704 RightHeader.30
PA10: RightHeader.15 U1.69 | length 16.3
  Top Layer w0.3: U1.69 58.98,45.974 67.437,45.974 RightHeader.15
PA11: RightHeader.31 U1.70 | length 12.5
  Top Layer w0.3: U1.70 58.417,47.244 RightHeader.31
PA12: RightHeader.14 U1.71 | length 14.8
  Top Layer w0.3: U1.71 57.854,48.514 67.437,48.514 RightHeader.14
PA15: RightHeader.32 U1.77 | length 13.5
  Top Layer w0.3: U1.77 57.229,55.928 59.553,55.928 61.087,54.394 61.087,52.76 64.063,49.784 RightHeader.32
PB0: LeftHeader.30 U1.35 | length 18
  Top Layer w0.3: LeftHeader.30 26.797,45.974 29.718,45.974 30.996,44.696 36.098,44.696 U1.35
PB1: LeftHeader.15 U1.36 | length 15
  Top Layer w0.3: LeftHeader.15 29.083,44.704 29.591,44.196 36.305,44.196 U1.36
PB4: RightHeader.38 U1.90 | length 17.1
  Top Layer w0.3: U1.90 52.942,60.833 56.141,64.032 60.984,64.032 62.738,65.786 64.389,65.786 65.151,65.024 RightHeader.38
PB5: RightHeader.7 U1.91 | length 20.2
  Top Layer w0.3: U1.91 55.934,64.532 60.777,64.532 62.539,66.294 67.437,66.294 RightHeader.7
PB6: RightHeader.39 U1.92 | length 17.9
  Top Layer w0.3: U1.92 55.727,65.032 60.57,65.032 63.102,67.564 RightHeader.39
PB7: RightHeader.6 U1.93 | length 21.7
  Top Layer w0.3: U1.93 55.519,65.532 60.363,65.532 63.665,68.834 67.437,68.834 RightHeader.6
PB8: RightHeader.40 U1.95 | length 19.6
  Top Layer w0.3: U1.95 57.304,68.731 62.762,68.731 64.135,70.104 RightHeader.40
PB9: RightHeader.5 U1.96 | length 23.4
  Top Layer w0.3: U1.96 57.097,69.231 62.5,69.231 64.643,71.374 67.437,71.374 RightHeader.5
PB10: LeftHeader.20 U1.47 | length 22.1
  Top Layer w0.3: LeftHeader.20 31.891,32.004 U1.47
PB11: LeftHeader.24 U1.48 | length 25.9
  Top Layer w0.3: LeftHeader.24 26.797,30.734 31.328,30.734 U1.48
PB12: LeftHeader.21 U1.51 | length 26.3
  Top Layer w0.3: LeftHeader.21 30.765,29.464 36.099,34.798 39.281,34.798 U1.51
PB13: LeftHeader.23 U1.52 | length 32.7
  Top Layer w0.3: LeftHeader.23 26.797,28.194 30.202,28.194 36.306,34.298 39.488,34.298 47.1,41.91 49.022,41.91 49.657,42.545 49.657,43.276 U1.52
PB14: LeftHeader.22 U1.53 | length 34.1
  Top Layer w0.3: LeftHeader.22 36.322,26.924 36.957,27.559 36.957,32.639 38.116,33.798 39.695,33.798 47.299,41.402 49.221,41.402 50.157,42.338 50.157,43.483 U1.53
PB15: RightHeader.23 U1.54 | length 25.5
  Top Layer w0.3: U1.54 61.349,32.998 61.349,29.075 63.5,26.924 65.151,26.924
PC0: LeftHeader.37 U1.15 | length 20.3
  Top Layer w0.3: LeftHeader.37 26.797,63.754 29.337,63.754 30.099,64.516 37.286,64.516 39.735,62.067 39.735,59.562 U1.15
PC1: LeftHeader.8 U1.16 | length 17.1
  Top Layer w0.3: LeftHeader.8 28.829,62.484 30.361,64.016 37.079,64.016 39.235,61.86 39.235,59.355 U1.16
PC2: LeftHeader.36 U1.17 | length 20.1
  Top Layer w0.3: LeftHeader.36 26.797,61.214 28.829,61.214 31.131,63.516 36.872,63.516 38.735,61.653 38.735,59.148 U1.17
PC3: LeftHeader.9 U1.18 | length 16.9
  Top Layer w0.3: LeftHeader.9 28.321,59.944 31.393,63.016 36.665,63.016 38.227,61.454 38.227,58.948 U1.18
PC4: LeftHeader.31 U1.33 | length 17.7
  Top Layer w0.3: LeftHeader.31 26.797,48.514 29.083,48.514 31.877,45.72 35.707,45.72 U1.33
PC5: LeftHeader.14 U1.34 | length 13.8
  Top Layer w0.3: 29.083,47.244 29.155,47.244 31.203,45.196 35.891,45.196 U1.34
PC6: RightHeader.18 U1.63 | length 20.7
  Top Layer w0.3: U1.63 62.357,38.354 67.437,38.354 RightHeader.18
PC7: RightHeader.28 U1.64 | length 16.9
  Top Layer w0.3: U1.64 61.794,39.624 RightHeader.28
PC8: RightHeader.17 U1.65 | length 19.2
  Top Layer w0.3: U1.65 61.231,40.894 67.437,40.894 RightHeader.17
PC9: RightHeader.29 U1.66 | length 15.4
  Top Layer w0.3: U1.66 60.668,42.164 RightHeader.29
PC10: RightHeader.13 U1.78 | length 16.7
  Top Layer w0.3: U1.78 57.022,56.428 59.76,56.428 61.849,54.339 61.849,52.705 63.5,51.054 67.437,51.054 RightHeader.13
PC11: RightHeader.33 U1.79 | length 13.5
  Top Layer w0.3: U1.79 56.815,56.928 59.967,56.928 62.738,54.157 62.738,52.832 63.246,52.324 RightHeader.33
PC12: RightHeader.12 U1.80 | length 15.9
  Top Layer w0.3: U1.80 56.608,57.428 60.174,57.428 64.008,53.594 67.437,53.594 RightHeader.12
PC13: LeftHeader.6 U1.7 | length 18.3
  Top Layer w0.3: LeftHeader.6 36.36,67.564 40.892,63.032 41.922,63.032 U1.7
PC14: LeftHeader.38 U1.8 | length 20.7
  Top Layer w0.3: LeftHeader.38 26.797,66.294 36.923,66.294 40.685,62.532 41.715,62.532 U1.8
PC15: LeftHeader.7 U1.9 | length 16.9
  Top Layer w0.3: LeftHeader.7 37.485,65.024 40.477,62.032 41.507,62.032 U1.9
PD0: RightHeader.34 U1.81 | length 12.9
  Top Layer w0.3: U1.81 56.401,57.928 60.381,57.928 63.445,54.864 RightHeader.34
PD1: RightHeader.11 U1.82 | length 16.1
  Top Layer w0.3: U1.82 56.194,58.428 60.588,58.428 62.882,56.134 67.437,56.134 RightHeader.11
PD2: RightHeader.35 U1.83 | length 13.1
  Top Layer w0.3: U1.83 55.987,58.928 60.795,58.928 62.319,57.404 RightHeader.35
PD3: RightHeader.10 U1.84 | length 16.3
  Top Layer w0.3: U1.84 55.787,59.436 60.994,59.436 61.756,58.674 67.437,58.674 RightHeader.10
PD4: RightHeader.36 U1.85 | length 13.3
  Top Layer w0.3: U1.85 55.588,59.944 RightHeader.36
PD5: RightHeader.9 U1.86 | length 17.1
  Top Layer w0.3: U1.86 55.381,60.444 63.111,60.444 63.881,61.214 67.437,61.214 RightHeader.9
PD6: RightHeader.37 U1.87 | length 14.8
  Top Layer w0.3: U1.87 55.174,60.944 62.722,60.944 64.262,62.484 RightHeader.37
PD7: RightHeader.8 U1.88 | length 18.6
  Top Layer w0.3: U1.88 54.967,61.444 62.079,61.444 64.389,63.754 67.437,63.754 RightHeader.8
PD8: RightHeader.22 U1.55 | length 28.7
  Top Layer w0.3: U1.55 61.849,33.205 61.849,29.591 63.246,28.194 67.437,28.194 RightHeader.22
PD9: RightHeader.24 U1.56 | length 23.4
  Top Layer w0.3: U1.56 62.357,33.404 62.357,30.607 63.5,29.464 65.151,29.464
PD10: RightHeader.21 U1.57 | length 26.1
  Top Layer w0.3: U1.57 62.992,33.476 62.992,31.75 64.008,30.734 67.437,30.734 RightHeader.21
PD11: RightHeader.25 U1.58 | length 21.3
  Top Layer w0.3: U1.58 65.171,32.004 RightHeader.25
PE0: RightHeader.41 U1.97 | length 21.1
  Top Layer w0.3: U1.97 56.89,69.731 61.785,69.731 64.698,72.644 RightHeader.41
PE1: RightHeader.4 U1.98 | length 24.9
  Top Layer w0.3: U1.98 56.683,70.231 61.523,70.231 65.206,73.914 67.437,73.914 RightHeader.4
PE2: LeftHeader.41 U1.1 | length 25.3
  Top Layer w0.3: LeftHeader.41 26.797,73.914 29.845,73.914 32.893,70.866 36.703,70.866 42.037,65.532 43.664,65.532 U1.1
PE3: LeftHeader.4 U1.2 | length 21.5
  Top Layer w0.3: LeftHeader.4 29.845,72.644 32.131,70.358 36.504,70.358 41.83,65.032 43.457,65.032 U1.2
PE4: LeftHeader.40 U1.3 | length 23.8
  Top Layer w0.3: LeftHeader.40 26.797,71.374 30.099,71.374 31.623,69.85 36.195,69.85 41.513,64.532 43.25,64.532 U1.3
PE5: LeftHeader.5 U1.4 | length 20
  Top Layer w0.3: LeftHeader.5 28.829,69.342 35.996,69.342 41.306,64.032 43.043,64.032 U1.4
PE6: LeftHeader.39 U1.5 | length 22.3
  Top Layer w0.3: LeftHeader.39 26.797,68.834 35.797,68.834 41.099,63.532 42.836,63.532 U1.5
PE7: LeftHeader.29 U1.38 | length 19.2
  Top Layer w0.3: LeftHeader.29 26.797,43.434 30.226,43.434 30.996,42.664 36.187,42.664 U1.38
PE8: LeftHeader.16 U1.39 | length 16.2
  Top Layer w0.3: LeftHeader.16 36.394,42.164 U1.39
PE9: LeftHeader.28 U1.40 | length 20
  Top Layer w0.3: LeftHeader.28 26.797,40.894 35.831,40.894 U1.40
PE10: LeftHeader.17 U1.41 | length 17.7
  Top Layer w0.3: LeftHeader.17 35.268,39.624 U1.41
PE11: LeftHeader.27 U1.42 | length 21.5
  Top Layer w0.3: LeftHeader.27 26.797,38.354 34.705,38.354 U1.42
PE12: LeftHeader.18 U1.43 | length 19.2
  Top Layer w0.3: LeftHeader.18 34.143,37.084 U1.43
PE13: LeftHeader.26 U1.44 | length 23
  Top Layer w0.3: LeftHeader.26 26.797,35.814 33.58,35.814 U1.44
PE14: LeftHeader.19 U1.45 | length 20.8
  Top Layer w0.3: LeftHeader.19@27.94,34.544 LeftHeader.19 33.017,34.544 U1.45
PE15: LeftHeader.25 U1.46 | length 24.4
  Top Layer w0.3: LeftHeader.25 26.797,33.274 32.454,33.274 U1.46
SWCLK: ProgrammingPort.9 U1.76 | length 32.7
  Top Layer w0.3: U1.76 v1(58.077,53.594)
  Bottom Layer w0.3: ProgrammingPort.9 47.117,29.972 47.117,32.258 59.309,44.45 59.309,52.362 v1(58.077,53.594)
SWDIO: ProgrammingPort.7 U1.72 | length 30.6
  Top Layer w0.3: U1.72 56.91,50.165 57.912,50.165 v1(58.547,49.53)
  Bottom Layer w0.3: ProgrammingPort.7 44.577,29.972 44.577,32.258 58.547,46.228 v1(58.547,49.53)
SWO: ProgrammingPort.13 U1.89 | length 45.8
  Top Layer w0.3: U1.89 55.3,62.484 v1(57.15,62.484)
  Bottom Layer w0.3: ProgrammingPort.13 52.197,29.972 52.197,32.258 59.944,40.005 59.944,61.341 58.801,62.484 v1(57.15,62.484)
pads on no net: ProgrammingPort.11 ProgrammingPort.17 ProgrammingPort.19

## Polygon pours and split planes (outlines as drawn)
GND on Bottom Layer "Bottom" (solid, remove dead copper, pour order 4): 24.003,25.4 24.003,81.788 70.231,81.788 70.231,25.4
GND on Top Layer "Top" (solid, remove dead copper, pour order 6): 70.231,81.788 70.231,25.4 24.003,25.4 24.003,81.788

## Keep-outs
Keep-Out Layer:
  the board outline again, w0.3

## Silkscreen, mask and mechanical layers (free items; w line width, h text height)
Top Overlay:
  text "GND" at 29.718,79.756 h1.5
  text "GND" at 61.722,79.756 h1.5
  text "5V" at 29.718,78.105 h1.5
  text "3.3V" at 61.849,78.105 h1.5
  text "REF" at 32.893,61.722 h1.5
  text "3.3" at 33.147,52.578 h1.5
  text "Programming Port" at 40.005,35.433 h2
Bottom Overlay:
  lines w0.15: 38.1,32.385 40.64,32.385 41.91,33.655 54.737,33.655 56.007,32.385 58.42,32.385 ; 49.657,27.94 49.657,31.877 ; 54.451,29.623 54.8,29.972 59.436,29.972 ; 57.023,28.194 58.24,27.559 59.579,27.559 60.119,28.099
  text "GND" at 49.784,34.163 h1.5
  text "3.3V" at 35.306,32.385 h1 r270
  text "NRST" at 62.103,29.718 h1
  text "NC" at 60.96,28.448 h1
  text "SWO" at 51.816,25.908 h1 r270
  text "3.3V" at 35.306,25.781 h1 r270
  text "GND" at 37.846,25.781 h1 r270
  text "GND" at 40.386,25.781 h1 r270
  text "DIO" at 43.053,25.781 h1 r270
  text "CLK" at 45.466,25.781 h1 r270
  text "NC" at 46.99,25.781 h1 r270

## Text inside footprints (layer, text, board x,y; h text height)
ProgrammingPort: Top Overlay "20" at 59.944,30.734 h1.5; Top Overlay "1" at 34.163,28.067 h1.5